# Altium PCB PCBboard3-改后.PcbDoc
Units mm, origin at the board's own origin, x right, y up, seen from the top; angles counter-clockwise.
Board outline 152.4 x 101.6 mm, 2 copper layers (Top Layer, Bottom Layer); 40 components, 39 nets, 148 pads, 48 vias.
Unrouted connection lines stored in the file: 15.
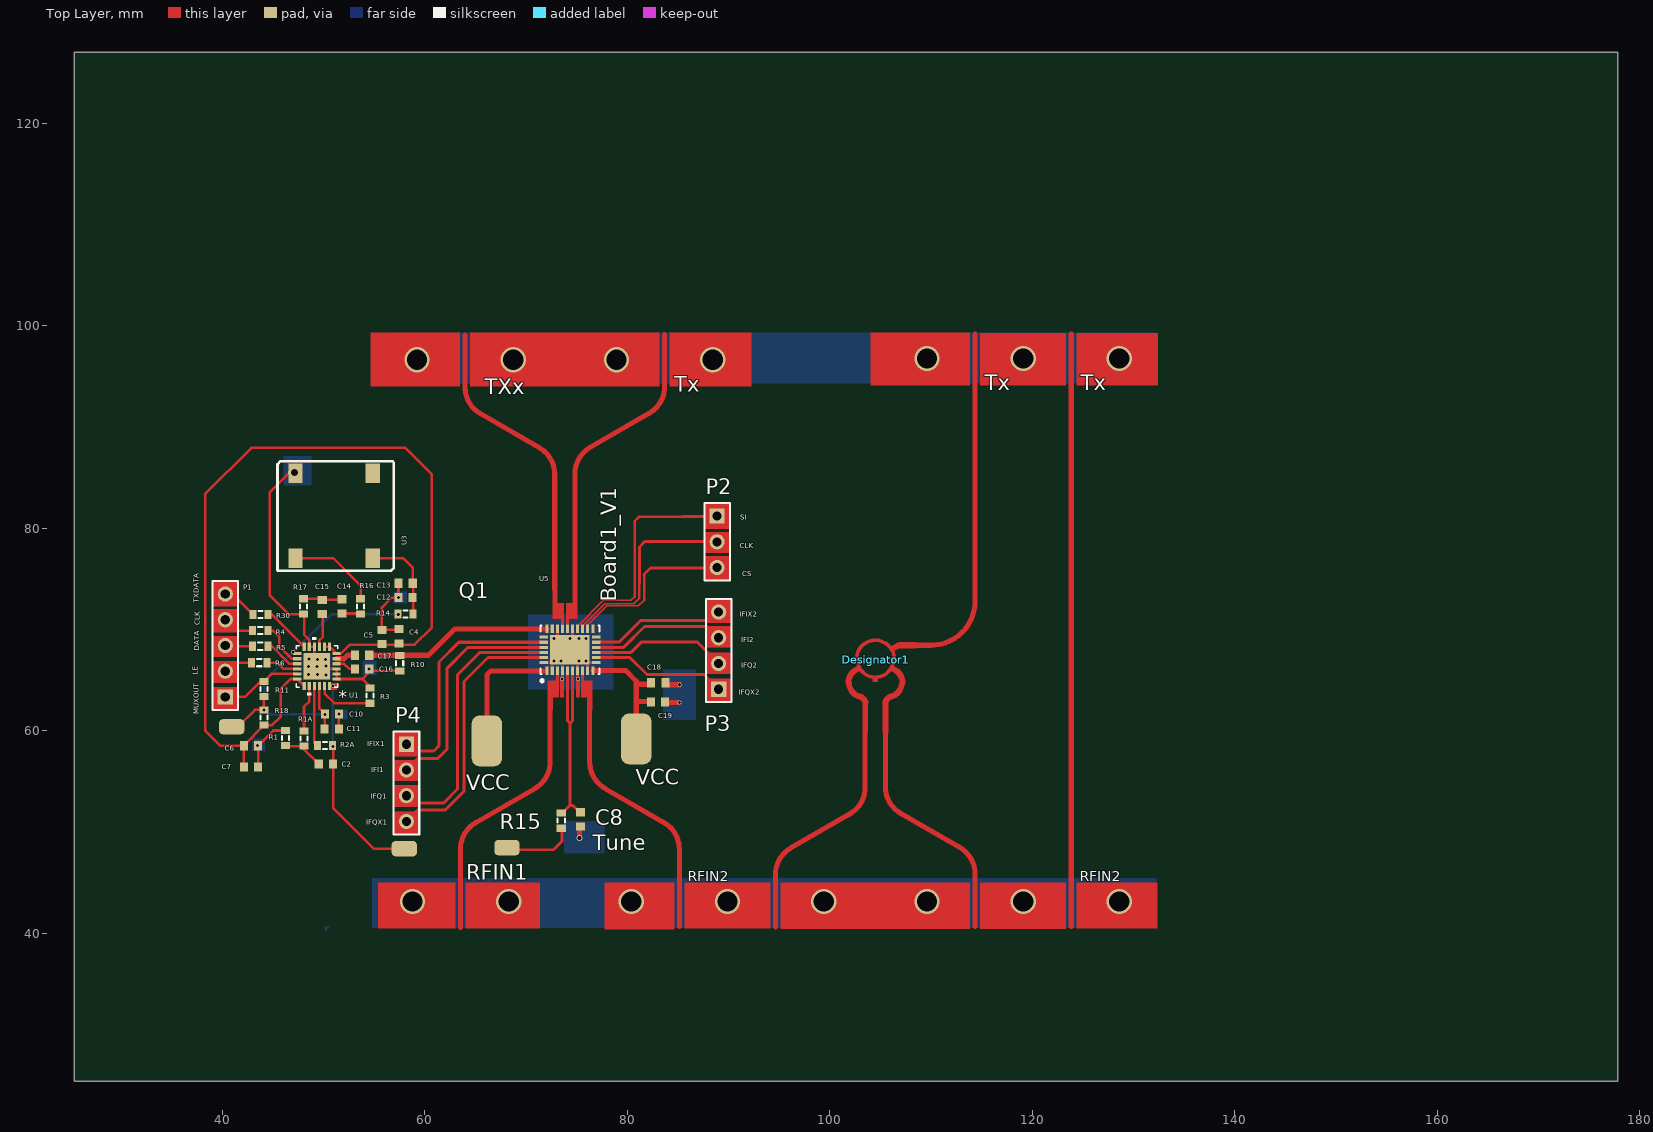
[diagram p0: Top Layer view]
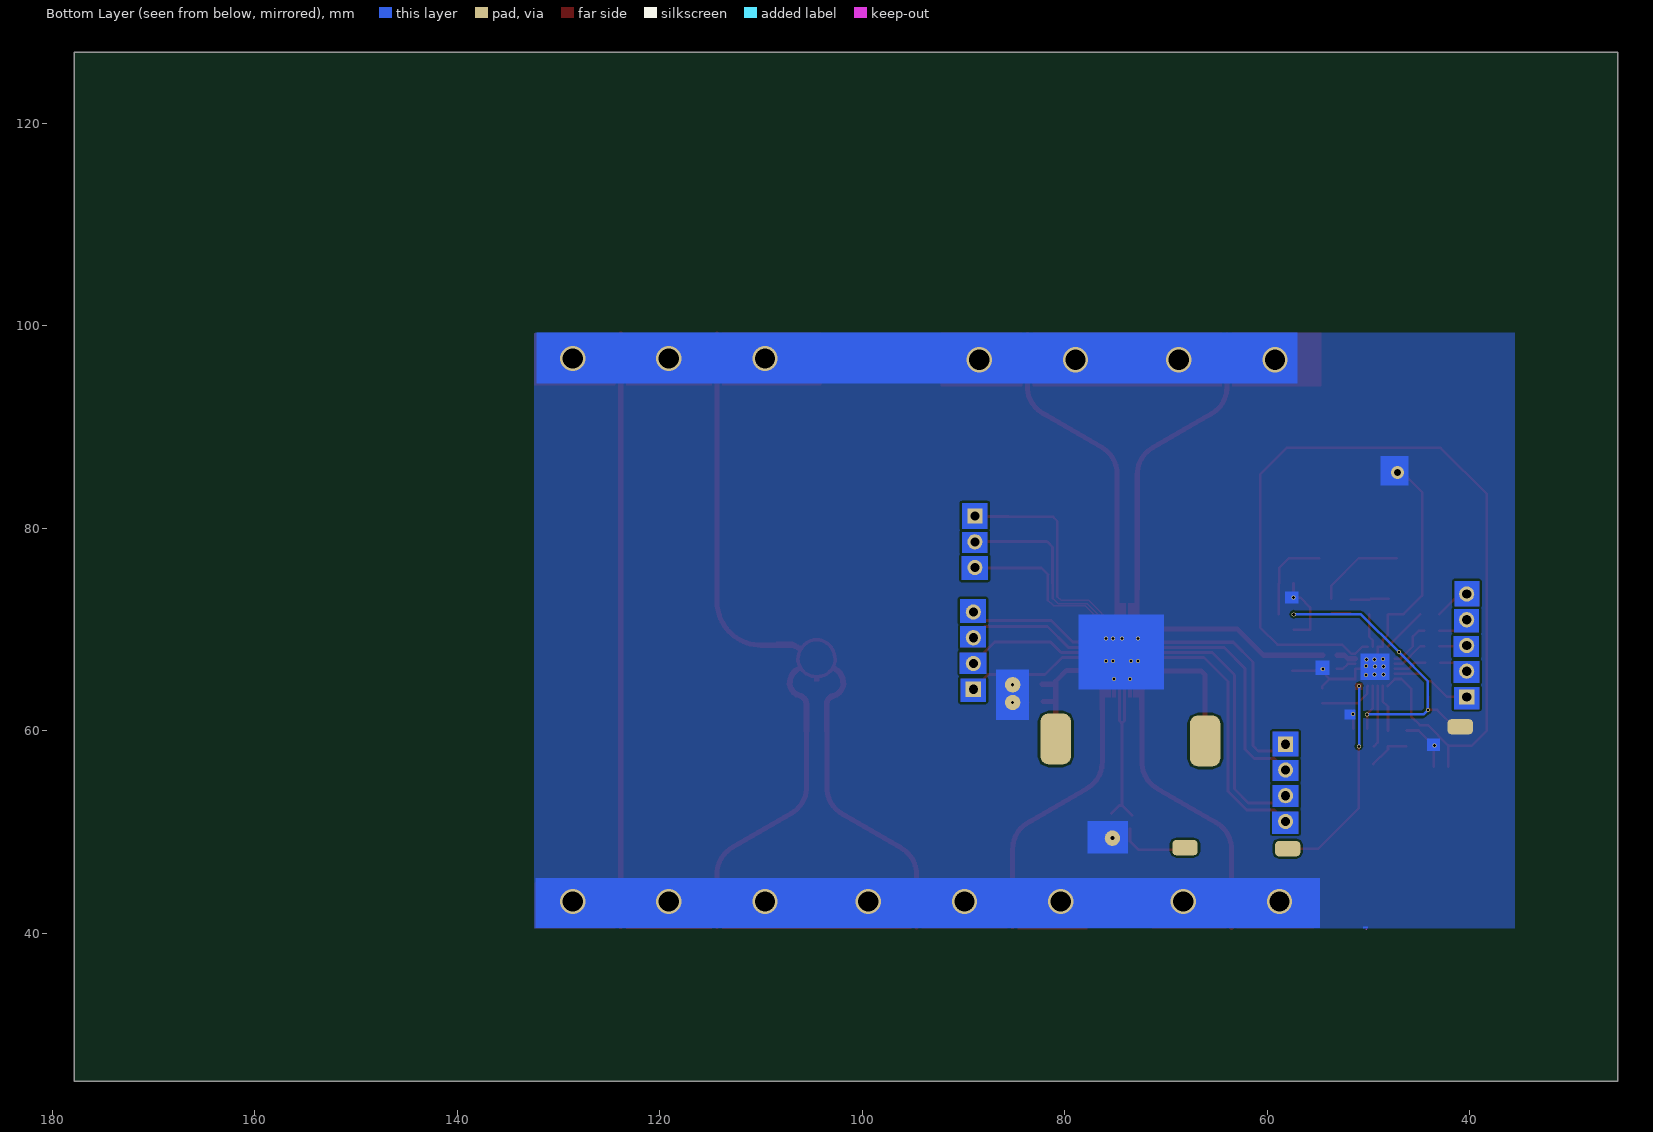
[diagram p1: Bottom Layer view, seen from below]

## Layer stack, top to bottom
Top Solder: solder mask 0.0102, Solder Resist, Dk 3.5
Top Layer: signal copper 0.0356
Dielectric1: dielectric 0.32, FR-4, Dk 4.8
Bottom Layer: signal copper 0.0356
Bottom Solder: solder mask 0.0102, Solder Resist, Dk 3.5

## Board outline
25.4,25.4 177.8,25.4 177.8,127 25.4,127

## Design rules (kind name [scope] priority, off if disabled: settings)
Clearance [All] p1: gap=0.2
PolygonConnect [All] p1: connectstyle=Relief reliefconductorwidth=0.254 reliefentries=4 polygonreliefangle="90 Angle" airgapwidth=0.254
RoutingVias [All] p1: holewidth=0.711 width=1.27 viastyle="Through Hole" minholewidth=0.711 minwidth=1.27 maxholewidth=0.711 maxwidth=1.27
SolderMaskExpansion [All] p1: expansion=0.102
Width [All] p1: maxlimit=1.27 minlimit=0.254 preferedwidth=0.254
30 further rules are at their usual default settings.

## Components (designator, comment, footprint, x,y, rotation, side; value= is the part's Value field where it differs from the comment)
C2 "100pF" 1608[0603] 50.241,56.718 r0 top
C4 "0.1uF" 1608[0603] 57.455,69.342 r90 top
C5 "10pF" 1608[0603] 55.778,69.266 r90 top
C6 "0.1uF" 1608[0603] 42.85,58.522 r180 top
C7 "10pF" 1608[0603] 42.85,56.439 r180 top
C8 "100pF" 1608[0603] 75.387,51.257 r90 top
C10 "0.1uF" 1608[0603] 50.851,61.671 r0 top
C11 "0.1uF" 1608[0603] 50.825,60.198 r0 top
C12 "22uF" 1608[0603] 58.101,73.152 r0 top
C13 "10pF" 1608[0603] 58.115,74.574 r0 top
C14 "1nF" 1608[0603] 51.816,72.288 r90 top
C15 "1nF" 1608[0603] 49.886,72.238 r270 top
C16 "100pF" 1608[0603] 53.823,66.116 r180 top
C17 "100pF" 1608[0603] 53.823,67.462 r0 top
C18 "470uF" 1608[0603] 83.058,64.745 r180 top
C19 "1uF" 1608[0603] 83.033,62.84 r0 top
Designator1 "Comment" *U13 104.546,67.005 r90 top
Designator1 "Comment" *U12 104.546,67.005 r90 top
P1 "Header 5" HDR1X5 40.31,63.348 r90 top
P2 "Header 3" HDR1X3 88.875,81.204 r270 top
P3 "Header 4" HDR1X4 89.027,64.11 r90 top
P4 "Header 4" HDR1X4 58.191,58.674 r270 top
R1 "51R" J1-0603 46.253,59.284 r90 top
R1A "51R" J1-0603 48.082,59.246 r270 top
R2A "51R" J1-0603 50.165,58.547 r0 top
R3 "4K7" J1-0603 54.585,63.475 r90 top
R4 "330R" J1-0603 43.764,69.901 r180 top
R5 "330R" J1-0603 43.764,68.351 r180 top
R6 "330R" J1-0603 43.663,66.726 r180 top
R10 "51R" J1-0603 57.531,66.675 r90 top
R11 "0R" J1-0603 44.12,64.135 r270 top
R14 "0R" J1-0603 58.101,71.526 r0 top
R15 "51R" J1-0603 73.482,51.13 r270 top (schematic designator C15)
R16 "0r" J1-0603 53.67,72.288 r270 top
R17 "51R" J1-0603 48.031,72.288 r90 top
R18 "0r" J1-0603 44.145,61.316 r270 top
R30 "0R" J1-0603 43.79,71.501 r180 top
U1 "ADF4158CCPZ" CP_24_7 49.352,66.37 r180 top
U3 "CO" FOX801BE-100 54.864,85.446 r270 top
U5 "BGT24MTR12" QFN50P540X440X90_HS-33N 74.346,67.996 r90 top

## Footprints (in the part's own frame and the unit in brackets; to place one, negate y for a bottom-side part, rotate by r counter-clockwise, add the part's x,y. Pads: shape width x height; smd on the part's side, far side on the other; paste and mask are expansions set on the pad)
1608[0603] [mm] "Chip Capacitor, Body 1.6x0.8mm, IPC High Density"
  rect 0.8x0.9 smd: 1(-0.7,0) 2(0.7,0)
  body extent -0.87,-0.48 0.87,0.48, height 1.3
*U12 [mm]
  Top Layer drawing of 704 lines, arcs and shapes, not listed
*U13 [mm]
  Top Layer region: -0.616,-1.763 -0.778,-1.684 -0.572,-1.684
  Top Layer region: -0.616,-1.763 -0.618,-1.763 -0.778,-1.684
  Top Layer region: -0.616,-1.764 -0.618,-1.763 -0.616,-1.763
  Top Layer region: -0.572,-1.684 -0.842,-1.652 -0.627,-1.652
  Top Layer region: -0.572,-1.684 -0.778,-1.684 -0.842,-1.652
  Top Layer region: 0.893,-1.763 0.847,-1.684 1.053,-1.684
  Top Layer region: 1.053,-1.684 0.903,-1.652 1.118,-1.652
  Top Layer region: 1.053,-1.684 0.847,-1.684 0.903,-1.652
  Top Layer region: -0.627,-1.652 -1.051,-1.513 -0.868,-1.513
  Top Layer region: -0.627,-1.652 -0.842,-1.652 -1.051,-1.513
  Top Layer region: 1.118,-1.652 1.143,-1.513 1.326,-1.513
  Top Layer region: 1.118,-1.652 0.903,-1.652 1.143,-1.513
  Top Layer region: 1.326,-1.513 1.143,-1.513 1.28,-1.434
  Top Layer region: -0.868,-1.513 -1.051,-1.513 -1.005,-1.434
  Top Layer region: -1.715,-0.204 -1.822,0.046 -1.715,0.046
  Top Layer region: -1.715,-0.204 -1.806,-0.204 -1.822,0.046
  Top Layer region: -1.715,0.046 -1.806,0.296 -1.715,0.296
  Top Layer region: -1.715,0.046 -1.822,0.046 -1.806,0.296
  Top Layer region: -0.868,1.604 -0.842,1.744 -0.627,1.744
  Top Layer region: -0.868,1.604 -1.051,1.604 -0.842,1.744
  Top Layer region: -1.005,1.525 -1.051,1.604 -0.868,1.604
  Top Layer region: -0.627,1.744 -0.778,1.775 -0.572,1.775
  Top Layer region: -0.627,1.744 -0.842,1.744 -0.778,1.775
  Top Layer region: -0.572,1.775 -0.778,1.775 -0.616,1.855
  Top Layer lines w0: -1.806,0.296 -1.822,0.046 -1.806,-0.204 ; -1.715,0.296 -1.715,0.046 -1.715,-0.204 ; -0.616,1.855 -0.778,1.775 -0.842,1.744 -1.051,1.604 -1.005,1.525 -0.868,1.604 -0.627,1.744 -0.572,1.775 -0.616,1.855 ; -1.005,-1.434 -1.051,-1.513 -0.842,-1.652 -0.778,-1.684 -0.618,-1.763 -0.616,-1.764 -0.616,-1.763 -0.572,-1.684 -0.627,-1.652 -0.868,-1.513 -1.005,-1.434 ; 1.28,-1.434 1.326,-1.513 1.118,-1.652 1.053,-1.684 0.893,-1.763 0.847,-1.684 0.903,-1.652 1.143,-1.513 1.28,-1.434
CP_24_7 [mil]
  rect 32x12 smd mask+5: 1(-76.5,49.21) 2(-76.5,29.53) 3(-76.5,9.84) 4(-76.5,-9.84) 5(-76.5,-29.53) 6(-76.5,-49.21) 13(76.5,-49.21) 14(76.5,-29.53) 15(76.5,-9.84) 16(76.5,9.84) 17(76.5,29.53) 18(76.5,49.21)
  rect 12x32 smd mask+5: 7(-49.21,-76.5) 8(-29.53,-76.5) 9(-9.84,-76.5) 10(9.84,-76.5) 11(29.53,-76.5) 12(49.21,-76.5) 19(49.21,76.5) 20(29.53,76.5) 21(9.84,76.5) 22(-9.84,76.5) 23(-29.53,76.5) 24(-49.21,76.5)
  rect 104x104 smd mask-51.5: 25(0,0)
  silkscreen extent -81,-112 81,112
FOX801BE-100 [mm]
  rect 1.9x1.4 smd: 1(0,0) 2(0,-7.62) 3(8.4,-7.62) 4(8.4,0)
  silkscreen extent -1.17,-9.4 9.62,2.1
HDR1X3 [mm] "Connector; Header; 3 Position"
  rect 1.5x1.5 hole 0.9: 1(0,0)
  round 1.5 hole 0.9: 2(2.54,0) 3(5.08,0)
  silkscreen extent -1.27,-1.27 6.35,1.27
HDR1X4 [mm] "Connector; Header; 4 Position"
  rect 1.5x1.5 hole 0.9: 1(0,0)
  round 1.5 hole 0.9: 2(2.54,0) 3(5.08,0) 4(7.62,0)
  silkscreen extent -1.27,-1.27 8.89,1.27
HDR1X5 [mm] "Connector; Header; 5 Position"
  rect 1.5x1.5 hole 0.9: 1(0,0)
  round 1.5 hole 0.9: 2(2.54,0) 3(5.08,0) 4(7.62,0) 5(10.16,0)
  silkscreen extent -1.27,-1.27 11.43,1.27
J1-0603 [mm] "Chip Resistor, Body 1.6x0.8mm, IPC High Density"
  rect 0.7x0.9 smd: 1(-0.75,0) 2(0.75,0)
  silkscreen extent -0.2,-0.35 0.2,0.35, body extent -0.85,-0.48 0.85,0.48, height 0.9
QFN50P540X440X90_HS-33N [mm] "QFN, 32-Leads, Body 5.40x4.40mm, Pitch 0.50mm, Thermal Pad 3.90x2.90mm, IPC Medium Density"
  rect 0.85x0.3 smd mask+0: 1(-2.075,2.25) 3(-2.075,1.25) 4(-2.075,0.75) 5(-2.075,0.25) 6(-2.075,-0.25) 7(-2.075,-0.75) 8(-2.075,-1.25) 9(-2.075,-1.75) 10(-2.075,-2.25) 17(2.075,-2.25) 18(2.075,-1.75) 19(2.075,-1.25) 20(2.075,-0.75) 21(2.075,-0.25) 22(2.075,0.25) 23(2.075,0.75) 24(2.075,1.25) 25(2.075,1.75) 26(2.075,2.25)
  rect 0.85x0.3 smd paste+0 mask+0: 2(-2.075,1.75)
  rect 0.3x0.85 smd mask+0: 11(-1.25,-2.575) 12(-0.75,-2.575) 13(-0.25,-2.575) 14(0.25,-2.575) 15(0.75,-2.575) 16(1.25,-2.575) 27(1.25,2.575) 28(0.75,2.575) 29(0.25,2.575) 30(-0.25,2.575) 31(-0.75,2.575) 32(-1.25,2.575)
  rect 2.9x3.9 smd mask+0: 33(0,0)
  Top Layer region: -6,-2.2 -4.7,-2.2 -4.7,-1.7 -6,-1.7
  Top Layer region: -6,1.7 -4.7,1.7 -4.7,2.2 -6,2.2
  Top Layer region: -4.7,-2.2 -3.05,-2.2 -3.05,-1.1 -4.7,-1.1
  Top Layer region: -3.05,-1.4 -2.5,-1.4 -2.5,-1.1 -3.05,-1.1
  Top Layer region: -4.7,1.1 -3.05,1.1 -3.05,2.2 -4.7,2.2
  Top Layer region: -3.05,1.1 -2.5,1.1 -2.5,1.4 -3.05,1.4
  Top Layer region: 4.65,-0.75 6.1,-0.75 6.1,-0.25 4.65,-0.25
  Top Layer region: 4.65,1.25 6.1,1.25 6.1,1.75 4.65,1.75
  Top Layer region: 3.049,0.6 4.649,0.6 4.649,1.75 3.049,1.75
  Top Layer region: 2.5,0.6 3.05,0.6 3.05,0.9 2.5,0.9
  Top Layer region: 3.048,-0.75 4.648,-0.75 4.648,0.4 3.048,0.4
  Top Layer region: 2.5,0.1 3.05,0.1 3.05,0.4 2.5,0.4
  Top Layer region: -1.4,1.95 -1.1,1.95 -1.1,2.175 -1.4,2.175
  Top Layer region: -1.4,-2.2 -1.1,-2.2 -1.1,-1.95 -1.4,-1.95
  silkscreen extent -3.17,-2.9 2.4,2.9

## Part data
C2 C4 C5 C6 C7 C8 C10 C11 C12 C13 C14 C15 C16 C17 C18 C19: library part "Cap Semi", "Capacitor (Semiconductor SIM Model)"
P1: "Header, 5-Pin"
P2: "Header, 3-Pin"
P3 P4: "Header, 4-Pin"
R1 R1A R2A R3 R4 R5 R6 R10 R11 R14 R15 R16 R17 R18 R30: library part Res3, "Resistor"
U1: "Imported"

## Free pads (board coordinates)
  rrect50% 2.5x1.5 all layers, no hole: 0(40.945,60.401) 0(57.988,48.362) 2(68.123,48.463)
  round 1.524 smd far side: 0(75.292,49.399) 0(85.142,62.799) 0(85.142,64.549)
  rrect50% 3x5 all layers, no hole: 2(66.142,58.999) 2(80.892,59.199)

## Via types
v1: diameter 0.4, hole 0.3, Top Layer to Bottom Layer, 31 vias
v2: diameter 2.5, hole 2, Top Layer to Bottom Layer, 15 vias
v3: diameter 1.27, hole 0.711, Top Layer to Bottom Layer, 1 vias
v4: diameter 0.6, hole 0.4, Top Layer to Bottom Layer, 1 vias

## Nets (pads, with @x,y where several pads share a name; then routed paths per layer and width w, separated by ;. In a path a pad name is that pad's centre, name@x,y a point inside that pad or via, vN(x,y) a via of type N, cw(c..) or ccw(c..) an arc to the next point about the centre after c; other vN are vias at no path point)
3V: C10.1 C11.1 pad.0@40.945,60.401 R11.2 R14.1 R18.1 U1.13 U1.22 | length 34.6
  Top Layer w0.254: pad.0@40.945,60.401 41.58,60.401 43.244,62.066 v1(44.145,62.066) ; R18.1@44.12,62.115 R11.2 ; U1.22 49.602,62.22 C10.1 v1(50.151,61.62) 50.151,60.223 C11.1
  Bottom Layer w0.254: v1(50.151,61.62) 44.59,61.62 v1(44.145,62.066) 44.145,64.897 v1(47.015,67.767) 50.775,71.526 57.364,71.526 v1(57.39,71.501)
GND: C4.2 C5.2 C6.1 C7.1 C8.1 C10.2 C11.2 C12.1 C13.1 C16.1 C18.1 C19.2 pad.0@75.292,49.399 pad.0@85.142,62.799 pad.0@85.142,64.549 R1.2 R3.2 R10.1 R17.1 U1.1 U1.2 U1.3 U1.10 U1.11 U1.25 U3.2 U5.2 U5.4 U5.7 U5.9 U5.11 U5.21 U5.24 U5.32 | length 51.1
  Top Layer w0.254: C7.1 C6.1 45.062,60.034 R1.2 ; v3(47.15,85.496) 46.634,85.496 44.704,83.566 44.704,73.355 46.546,71.513 R17.1@48.057,71.513 ; R17.1@48.108,71.462 48.108,69.469 48.602,68.974 U1.11 U1.10 U1.25@49.102,66.62 ; U1.25@49.602,66.12 U1.3 U1.2 U1.1 53.853,65.12 ; C11.2 C10.2@51.525,61.646 ; C16.1@54.523,65.789 53.853,65.12 ; R3.2 54.585,64.389 53.853,65.12 ; C16.1@54.714,65.925 R10.1 ; C4.2@57.379,69.966 C5.2 55.778,72.187 56.744,73.152 C12.1 ; C12.1@57.415,73.166 C13.1
  Top Layer w0.5: v4(75.292,49.399) C8.1@75.292,50.399 ; C19.2@83.742,62.799 v1@85.042,62.799 ; C18.1@83.792,64.549 v1(85.142,64.549)
  other v1: 43.51,58.572 51.551,61.671 85.142,62.799 73.542,65.099 75.142,65.099 50.241,65.532 49.403,65.557 48.514,65.583 54.523,66.116 48.539,66.345 49.352,66.37 50.241,66.396 49.403,67.056 50.216,67.056 48.565,67.081 57.415,73.177
  other v2: 58.792,43.149 68.292,43.149 80.392,43.149 89.892,43.149 99.392,43.149 109.592,43.149 119.092,43.149 128.592,43.15 59.242,96.649 68.742,96.649 78.942,96.649 88.442,96.649 109.592,96.761 119.092,96.761 128.592,96.761
NetC2_1: C2.1 R1.1 R1A.2 | length 4.2
  Top Layer w0.254: R1.1@46.291,58.496 R1A.2 48.082,58.177 C2.1
NetC4_1: C4.1 C5.1 C6.2 C7.2 R18.2 U1.6 U1.7 U1.8 U1.18 U1.19 | length 92.9
  Top Layer w0.254: C7.2 C6.2 ; U1.19 U1.18 46.756,65.12 45.796,64.16 45.796,61.417 44.945,60.566 R18.2 42.15,58.57 C6.2 ; U1.8 U1.7 U1.6 51.72,67.62 52.603,68.504 59.004,68.504 60.706,70.206 60.706,85.319 58.09,87.935 42.875,87.935 38.329,83.388 38.329,60.02 39.827,58.522 C6.2
NetC8_2: C8.2 R15.1 U5.5 U5.6 | length 21.5
  Top Layer w0.3: R15.1@73.342,51.649 74.342,52.649 ; U5.5@74.092,65.924 74.092,60.999 74.342,60.749 74.342,52.649 ; 74.392,60.699 74.392,60.799 74.592,60.999 U5.6@74.592,65.924 ; C8.2@75.392,51.849 74.592,52.649 74.342,52.649
NetC12_2: C12.2 C13.2 R14.2 U3.4 | length 8.9
  Top Layer w0.254: U3.4 57.879,77.046 58.815,76.11 C13.2 58.851,74.539 R14.2
NetC14_1: C14.1 R16.2 | length 1.8
  Top Layer w0.254: C14.1 R16.2@53.62,71.588
NetC14_2: C14.2 C15.1 R17.2 | length 3.6
  Top Layer w0.254: R17.2 C15.1@49.785,73.038 ; C15.1 C14.2@51.765,72.938
NetC15_2: C15.2 U1.9 | length 3.3
  Top Layer w0.254: U1.9 49.602,68.957 49.936,69.291 C15.2@49.936,71.487
NetC16_2: C16.2 U1.4 | length 2
  Top Layer w0.254: U1.4 52.049,66.62 52.553,66.116 C16.2
NetC17_1: C17.1 U1.5 | length 1.9
  Top Layer w0.5: U1.5 52.036,67.12 ; 52.113,67.197 52.378,67.462 C17.1
NetC17_2: C17.2 R10.2 U5.26 | length 18.7
  Top Layer w0.5: C17.2 60.376,67.462 62.984,70.071 U5.26
NETLABEL: C2.2 pad.0@57.988,48.362 R2A.2 U1.24 | length 20.8
  Top Layer w0.254: v1(50.966,58.471) 50.966,52.361 54.966,48.362 pad.0@57.988,48.362
  Bottom Layer w0.254: v1(50.927,64.44) 50.927,58.484 v1@50.952,58.459
NETLABEL1: pad.2@68.123,48.463 R15.2 | length 7
  Top Layer w0.254: pad.2@68.148,48.235 68.809,48.235 68.834,48.26 72.72,48.26
  Top Layer w0.3: 72.72,48.26 73.542,49.082 R15.2@73.542,50.349
NetP1_1: P1.1 R11.1 U1.17 | length 8
  Top Layer w0.254: P1.1 42.266,63.348 43.803,64.885 R11.1 44.855,65.62 U1.17
NetP1_2: P1.2 R6.2 | length 2.9
  Top Layer w0.254: P1.2 41.148,66.726 R6.2
NetP1_3: P1.3 R5.2 | length 2.7
  Top Layer w0.254: P1.3 40.386,68.351 R5.2
NetP1_4: P1.4 R4.2 | length 3.1
  Top Layer w0.254: P1.4 41.377,69.901 R4.2
NetP1_5: P1.5 R30.2 | length 2.8
  Top Layer w0.254: P1.5@41.033,73.508 R30.2
NetP2_1: P2.1 U5.20 | length 22.7
  Top Layer w0.127: U5.20 75.096,70.346 77.622,72.873 80.366,72.873 80.721,73.228
  Top Layer w0.254: 80.721,73.228 80.721,80.696 81.153,81.128 85.547,81.128 85.573,81.153
  Top Layer w0.305: 85.573,81.153 P2.1@88.646,81.153
NetP2_2: P2.2 U5.19 | length 20
  Top Layer w0.127: U5.19 75.596,70.363 77.787,72.555 80.658,72.555 81.204,73.101
  Top Layer w0.254: 81.204,73.101 81.204,74.574
  Top Layer w0.305: 81.204,74.574 81.204,78.156 81.737,78.689 P2.2@88.9,78.689
NetP2_3: P2.3 U5.18 | length 17
  Top Layer w0.127: U5.18 76.096,70.482 77.953,72.339 81.102,72.339 81.661,72.898
  Top Layer w0.254: 81.661,72.898 81.661,75.438
  Top Layer w0.305: 81.661,75.438 82.296,76.073 P2.3@88.875,76.073
NetP3_1: P3.1 U5.12 | length 13.4
  Top Layer w0.3: U5.12@76.917,67.249 80.249,67.249 81.94,65.557 87.579,65.557 P3.1
NetP3_2: P3.2 U5.13 | length 12.6
  Top Layer w0.3: U5.13@76.917,67.749 80.391,67.749 81.425,68.783 86.893,68.783 88.43,67.246
NetP3_3: P3.3 U5.14 | length 13.4
  Top Layer w0.3: U5.14@76.917,68.249 79.642,68.249 81.7,70.307 87.909,70.307 P3.3
NetP3_4: P3.4 U5.15 | length 13.3
  Top Layer w0.3: U5.15@76.917,68.749 79.192,68.749 81.334,70.891 88.189,70.891 P3.4@88.976,71.679
NetP4_1: P4.1 U5.28 | length 22.7
  Top Layer w0.3: P4.1@58.674,58.674 59.334,58.014 60.909,58.014 61.417,58.522 61.417,66.802 63.361,68.746 U5.28
NetP4_2: P4.2 U5.29 | length 23.3
  Top Layer w0.3: P4.2 59.309,57.252 61.265,57.252 62.179,58.166 62.179,66.142 64.283,68.246 U5.29
NetP4_3: P4.3 U5.30 | length 26.7
  Top Layer w0.3: P4.3 58.928,52.857 61.849,52.857 63.246,54.254 63.246,65.532 65.46,67.746 U5.30
NetP4_4: P4.4 U5.31 | length 26.6
  Top Layer w0.3: P4.4 59.334,52.197 62.052,52.197 63.881,54.026 63.881,64.872 66.255,67.246 U5.31
NetR1A_1: R1A.1 U1.20 | length 4.6
  Top Layer w0.254: R1A.1 48.082,62.382 48.602,62.902 U1.20
NetR2A_1: R2A.1 U1.21 | length 6.1
  Top Layer w0.254: U1.21 49.102,58.834 R2A.1@49.466,58.471
NetR3_1: R3.1 U1.23 | length 5.6
  Top Layer w0.254: U1.23 50.123,64.407 50.123,63.681 51.079,62.725 R3.1
NetR4_1: R4.1 U1.14 | length 4.6
  Top Layer w0.254: R4.1 45.034,69.901 45.618,69.317 45.618,68.351 46.85,67.12 U1.14
NetR5_1: R5.1 U1.15 | length 3.6
  Top Layer w0.254: R5.1 44.907,68.351 46.638,66.62 U1.15
NetR6_1: R6.1 U1.16 | length 3.2
  Top Layer w0.254: R6.1 45.441,66.726 46.046,66.12 U1.16
NetR16_1: R16.1 U3.3 | length 8.9
  Top Layer w0.254: U3.3 50.97,77.046 53.67,74.346 R16.1
NetR30_1: R30.1 U1.12 | length 4.5
  Top Layer w0.254: 44.915,71.501 U1.12
VCC: C18.2 C19.1 pad.2@66.142,58.999 pad.2@80.892,59.199 U5.1 U5.10 | length 25.5
  Top Layer w0.5: pad.2@66.142,58.999 66.142,65.549 66.517,65.924 ; 66.521,65.921 71.907,65.921 ; U5.10@76.617,65.949 79.842,65.949 80.892,64.899 80.892,64.599 ; pad.2@80.892,59.199 80.892,62.899 ; C19.1@82.142,62.899 80.892,62.899 ; C18.2@82.242,64.599 80.892,64.599 ; 80.892,62.899 80.892,64.599
pads on no net: U3.1 U5.3 U5.8 U5.16 U5.17 U5.22 U5.23 U5.25 U5.27 U5.33
copper on no net: | length 250.8
  Top Layer w0.5: 63.542,40.599 63.542,48.249 ; 63.542,48.339 cw(c66.542,48.339) 65.042,50.937 ; 63.992,99.099 63.992,93.921 ccw(c66.992,93.921) 65.492,91.323 ; 65.041,50.937 70.859,54.296 ; 65.525,91.296 71.343,87.937 cw(c69.842,85.339) 72.842,85.339 ; 70.892,54.323 ccw(c69.392,56.921) 72.392,56.921 72.392,62.099 ; 72.842,73.949 72.842,85.249 ; 74.842,73.999 74.842,85.299 ; 74.842,85.389 cw(c77.842,85.389) 76.342,87.987 ; 76.292,62.099 76.292,56.921 ccw(c79.292,56.921) 77.792,54.323 ; 76.341,87.987 82.159,91.346 ; 77.825,54.296 83.643,50.937 cw(c82.142,48.339) 85.142,48.339 ; 82.192,91.373 ccw(c80.692,93.971) 83.692,93.971 83.692,99.149 ; 85.142,40.699 85.142,48.249 ; 94.642,40.649 94.642,45.827 cw(c97.642,45.827) 96.142,48.425 ; 96.175,48.452 101.993,51.811 ccw(c100.492,54.409) 103.492,54.409 ; 103.492,54.499 103.492,60 ; 105.492,54.459 ccw(c108.492,54.459) 106.992,51.861 ; 105.492,54.549 105.492,60 ; 106.991,51.861 112.809,48.502 ; 108.555,68.452 108.554,68.453 109.99,68.453 ; 109.99,68.451 ccw(c109.99,72.805) 114.344,72.805 ; 112.842,48.475 cw(c111.342,45.877) 114.342,45.877 114.342,40.699 ; 114.342,72.949 114.342,99.197 ; 123.842,40.7 123.842,99.197
  other v1: 72.746,66.896 73.446,66.896 75.246,66.896 75.946,66.896 72.746,69.096 74.346,69.096 75.246,69.096 75.946,69.096

## Polygon pours and split planes (outlines as drawn)
no net on Bottom Layer "Bottom Layer-No Net" (solid, pour order 3): 35.585,99.289 35.56,99.263 35.56,40.411 35.636,40.488 132.436,40.488 132.385,40.538 132.385,99.289 132.359,99.314 35.56,99.314

## Keep-outs
Keep-Out Layer:
  lines w0.025: 50.242,40.399 50.292,40.349

## Other copper
Top Layer:
  rectangle net GND: 124.342,40.489 132.34,45.001
  rectangle net GND: 124.342,94.112 132.403,99.289
  rectangle net GND: 114.842,94.112 123.342,99.289
  rectangle net GND: 104.013,94.112 113.842,99.314
  rectangle net NETLABEL: 50.597,64.008 51.333,64.745
  rectangle net GND: 54.661,94 63.492,99.314
  rectangle net GND: 64.492,94 83.192,99.314
  rectangle net GND: 84.192,94 92.253,99.314
  rectangle: 85.642,40.488 94.142,45
  rectangle: 77.749,40.386 84.642,45
  rectangle: 55.397,40.462 63.042,45.034
  rectangle: 64.042,40.462 71.399,45
  rectangle net GND: 74.942,65.299 75.242,65.499
  rectangle net GND: 73.442,65.299 73.742,65.499
  rectangle net GND: 74.942,63.299 75.342,65.299
  rectangle net GND: 73.342,63.299 73.742,65.299
  rectangle net GND: 72.942,69.418 73.242,69.649
  rectangle net GND: 74.442,69.418 74.742,69.649
  rectangle net GND: 72.442,66.345 72.742,66.549
  rectangle net GND: 73.442,66.345 73.742,66.549
  rectangle net GND: 74.942,66.345 75.242,66.549
  rectangle net GND: 75.942,66.345 76.242,66.549
  region net GND: 123.342,45 114.842,45 114.842,40.437 123.342,40.437
  region: 113.842,45 95.142,45 95.142,40.433 113.842,40.433
Bottom Layer:
  rectangle: 50.048,40.488 50.571,40.691
  rectangle net GND: 42.951,58.014 44.221,59.258
  rectangle net GND: 51.281,61.138 52.375,62.107
  rectangle net GND: 56.921,72.568 58.268,73.762
  rectangle net GND: 53.873,65.507 55.22,66.929
  rectangle net GND: 47.93,64.999 50.775,67.64
  rectangle net GND: 70.206,64.059 78.664,71.501
  rectangle net GND: 83.515,61.062 86.792,66.04
  rectangle net GND: 73.762,47.879 77.775,51.105
  rectangle net GND: 54.813,40.513 132.258,45.466
  rectangle net GND: 57.023,94.285 132.156,99.314
  rectangle net GND: 46.05,84.201 48.844,87.147
Multi-Layer:
  rectangle net NetP3_1: 87.782,62.865 90.297,65.151
  rectangle net NetP3_2: 87.732,65.634 90.373,67.742
  rectangle net NetP3_3: 87.782,68.224 90.322,70.333
  rectangle net NetP3_4: 87.757,70.637 90.348,73
  rectangle net NetP2_3: 87.579,74.905 90.195,77.267
  rectangle net NetP2_2: 87.605,77.572 90.17,79.654
  rectangle net NetP2_1: 87.63,79.908 90.145,82.499
  rectangle net NetP4_4: 56.896,49.835 59.512,52.045
  rectangle net NetP4_3: 56.896,52.476 59.487,54.635
  rectangle net NetP4_2: 56.921,55.042 59.487,57.125
  rectangle net NetP4_1: 56.896,57.48 59.487,59.919
  rectangle net NetP1_1: 39.065,62.128 41.58,64.313
  rectangle net NetP1_2: 39.065,64.745 41.605,66.878
  rectangle net NetP1_3: 39.091,67.285 41.605,69.367
  rectangle net NetP1_4: 39.091,69.723 41.554,72.034
  rectangle net NetP1_5: 39.065,72.288 41.529,74.778

## Silkscreen, mask and mechanical layers (free items; w line width, h text height)
Top Overlay:
  text "Tx" at 115.292,93.611 h1.52
  text "Tx" at 124.792,93.611 h1.52
  text "Tx" at 84.642,93.499 h1.52
  text "TXx" at 65.942,93.249 h1.52
  text "SI" at 91.135,80.823 h0.51
  text "CLK" at 91.084,78.029 h0.51
  text "CS" at 91.364,75.286 h0.51
  text "Q1" at 63.348,73.076 h1.52
  text "Board1_V1" at 78.892,72.749 h1.52 r90
  text "TXDATA" at 37.694,72.644 h0.51 r90
  text "IFIX2" at 91.11,71.272 h0.51
  text "CLK" at 37.77,70.434 h0.51 r90
  text "IFI2" at 91.262,68.758 h0.51
  text "DATA" at 37.744,67.894 h0.51 r90
  text "IFQ2" at 91.262,66.218 h0.51
  text "LE" at 37.567,65.532 h0.51 r90
  text "IFQX2" at 91.034,63.576 h0.51
  text "MUXOUT" at 37.694,61.62 h0.51 r90
  text "IFIX1" at 54.331,58.496 h0.51
  text "IFI1" at 54.737,55.931 h0.51
  text "VCC" at 80.842,54.699 h1.52
  text "VCC" at 64.092,54.149 h1.52
  text "IFQ1" at 54.686,53.289 h0.51
  text "IFQX1" at 54.229,50.724 h0.51
  text "Tune" at 76.592,48.199 h1.52
  text "RFIN1" at 64.092,45.299 h1.52
  text "RFIN2" at 85.992,45.149 h1
  text "RFIN2" at 124.692,45.15 h1
Mechanical 1:
  lines w0.254: 35.535,40.386 132.461,40.386 132.461,99.365 35.535,99.365 35.535,40.386

## Text inside footprints (layer, text, board x,y; h text height)
U1: Top Overlay "*" at 52.337,64.489 h1.27 r180; Mechanical 13 "*" at 52.337,64.489 h1.27 r180